# Altium PCB Dashboard.PcbDoc
Units mm, origin at the board's own origin, x right, y up, seen from the top; angles counter-clockwise.
Board outline 70.4 x 85 mm, 2 copper layers (Top Layer, Bottom Layer); 26 components, 60 nets, 195 pads, 3 vias.
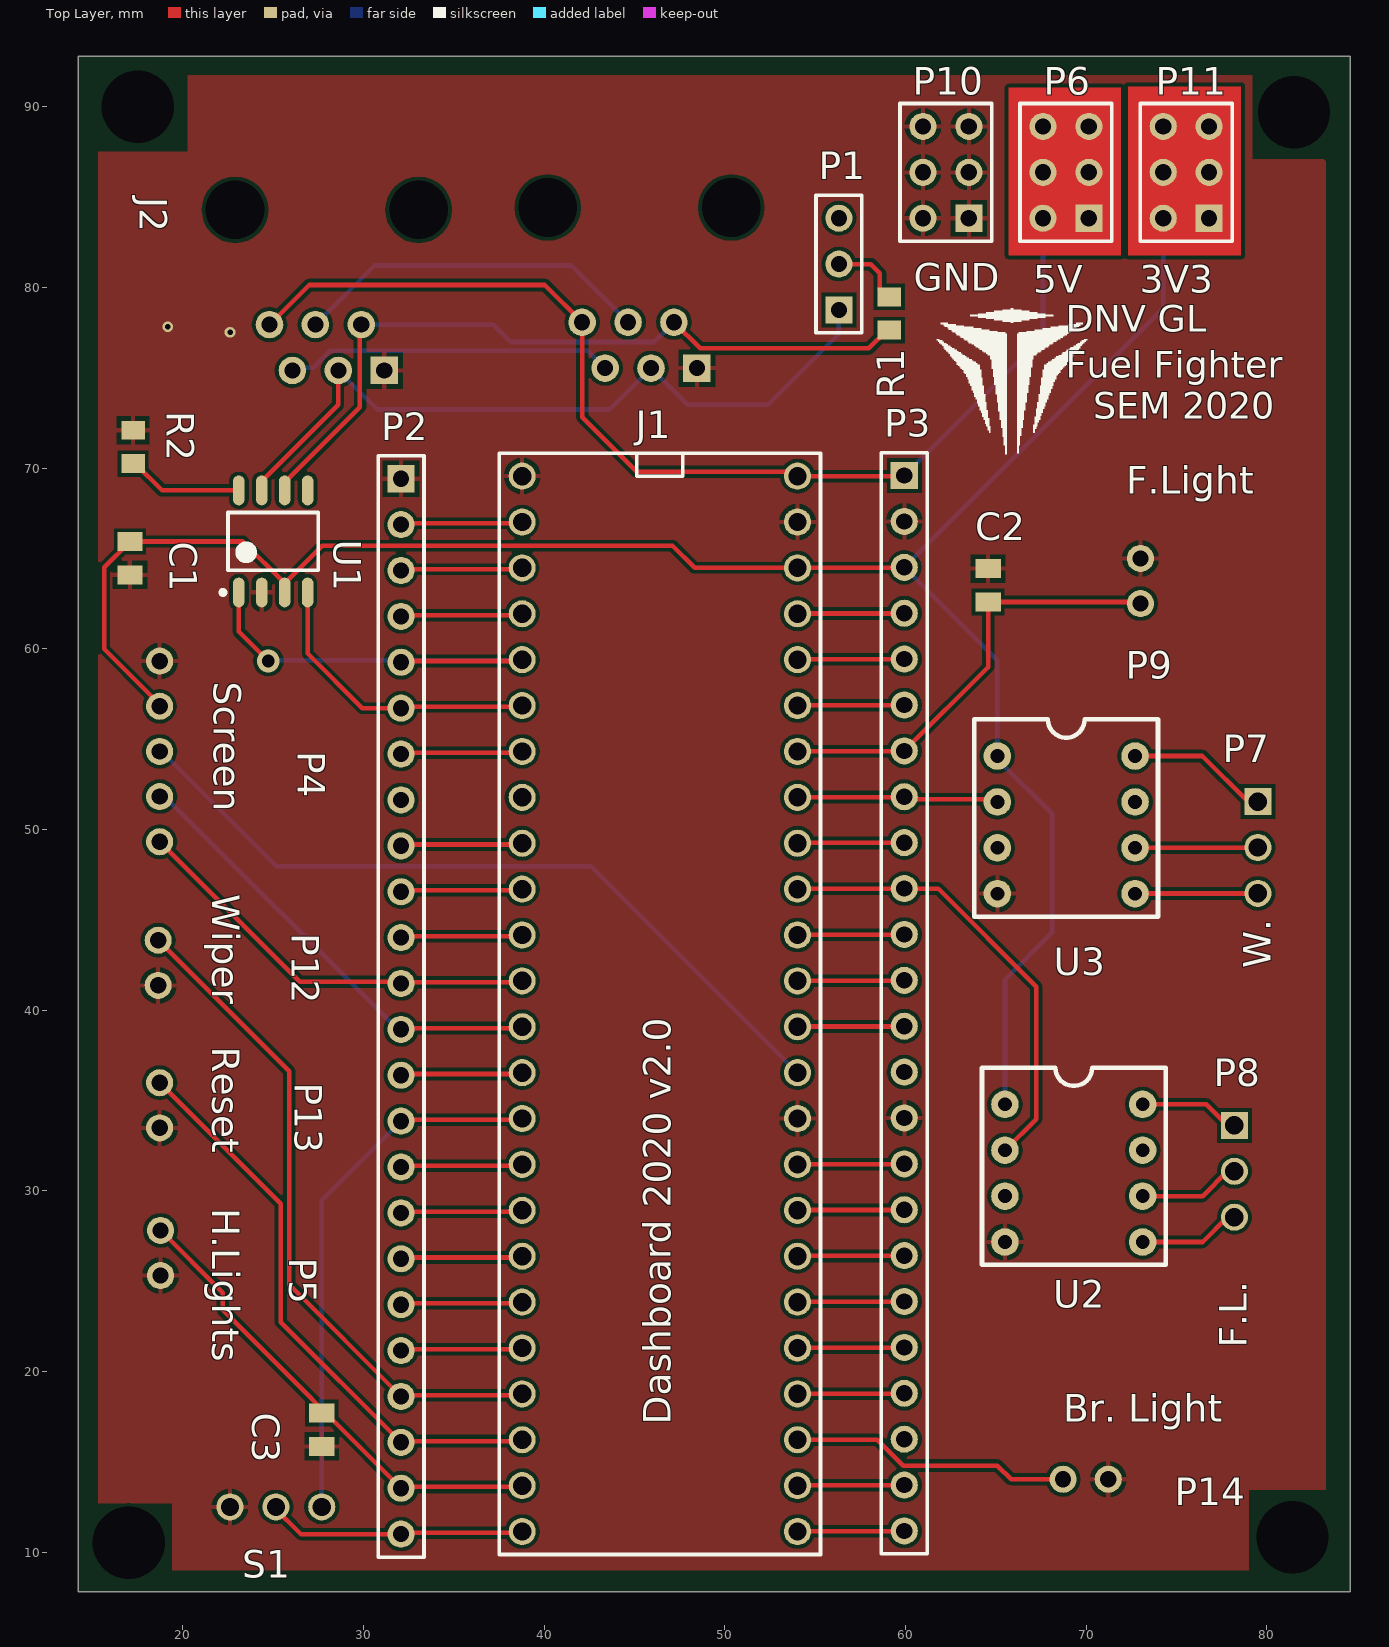
[diagram p0: Top Layer view]
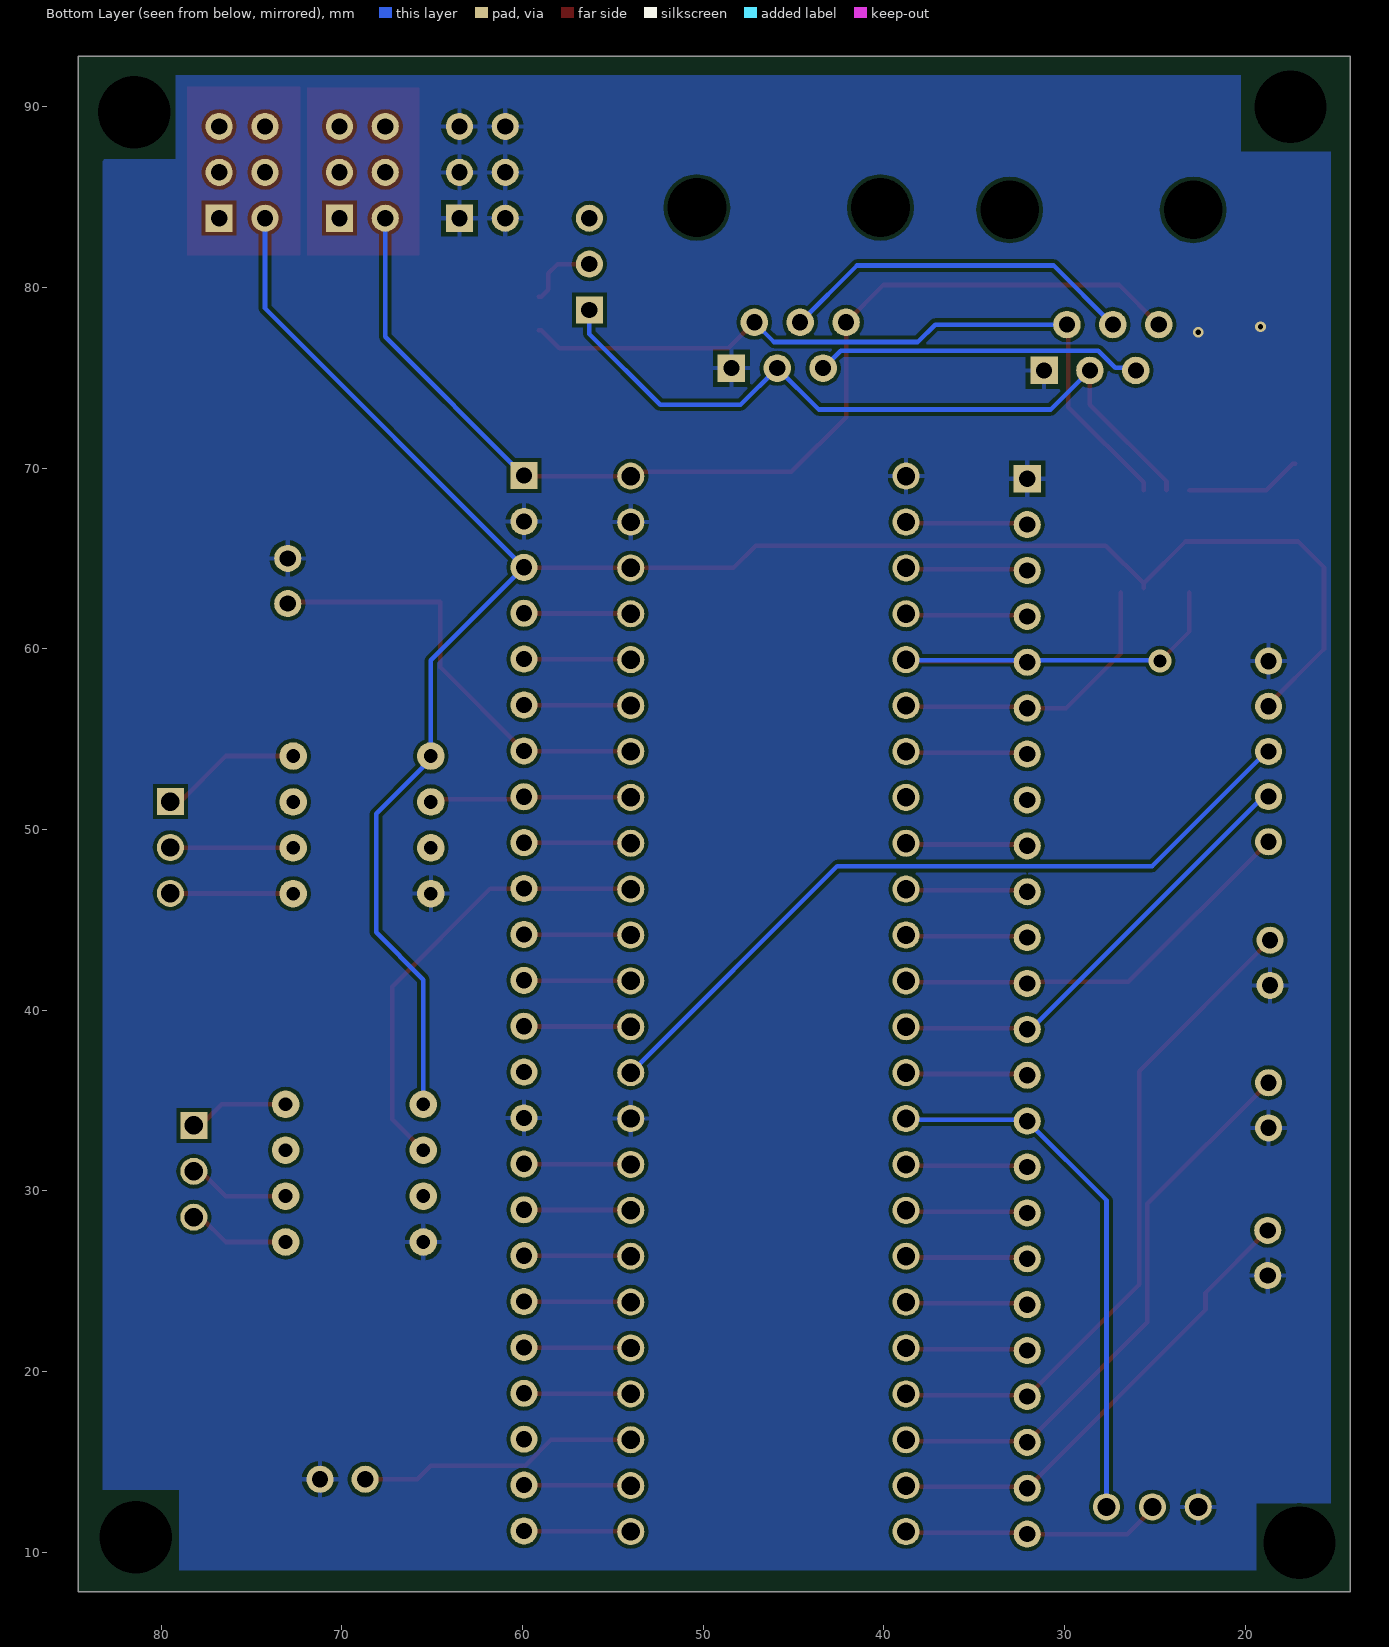
[diagram p1: Bottom Layer view, seen from below]
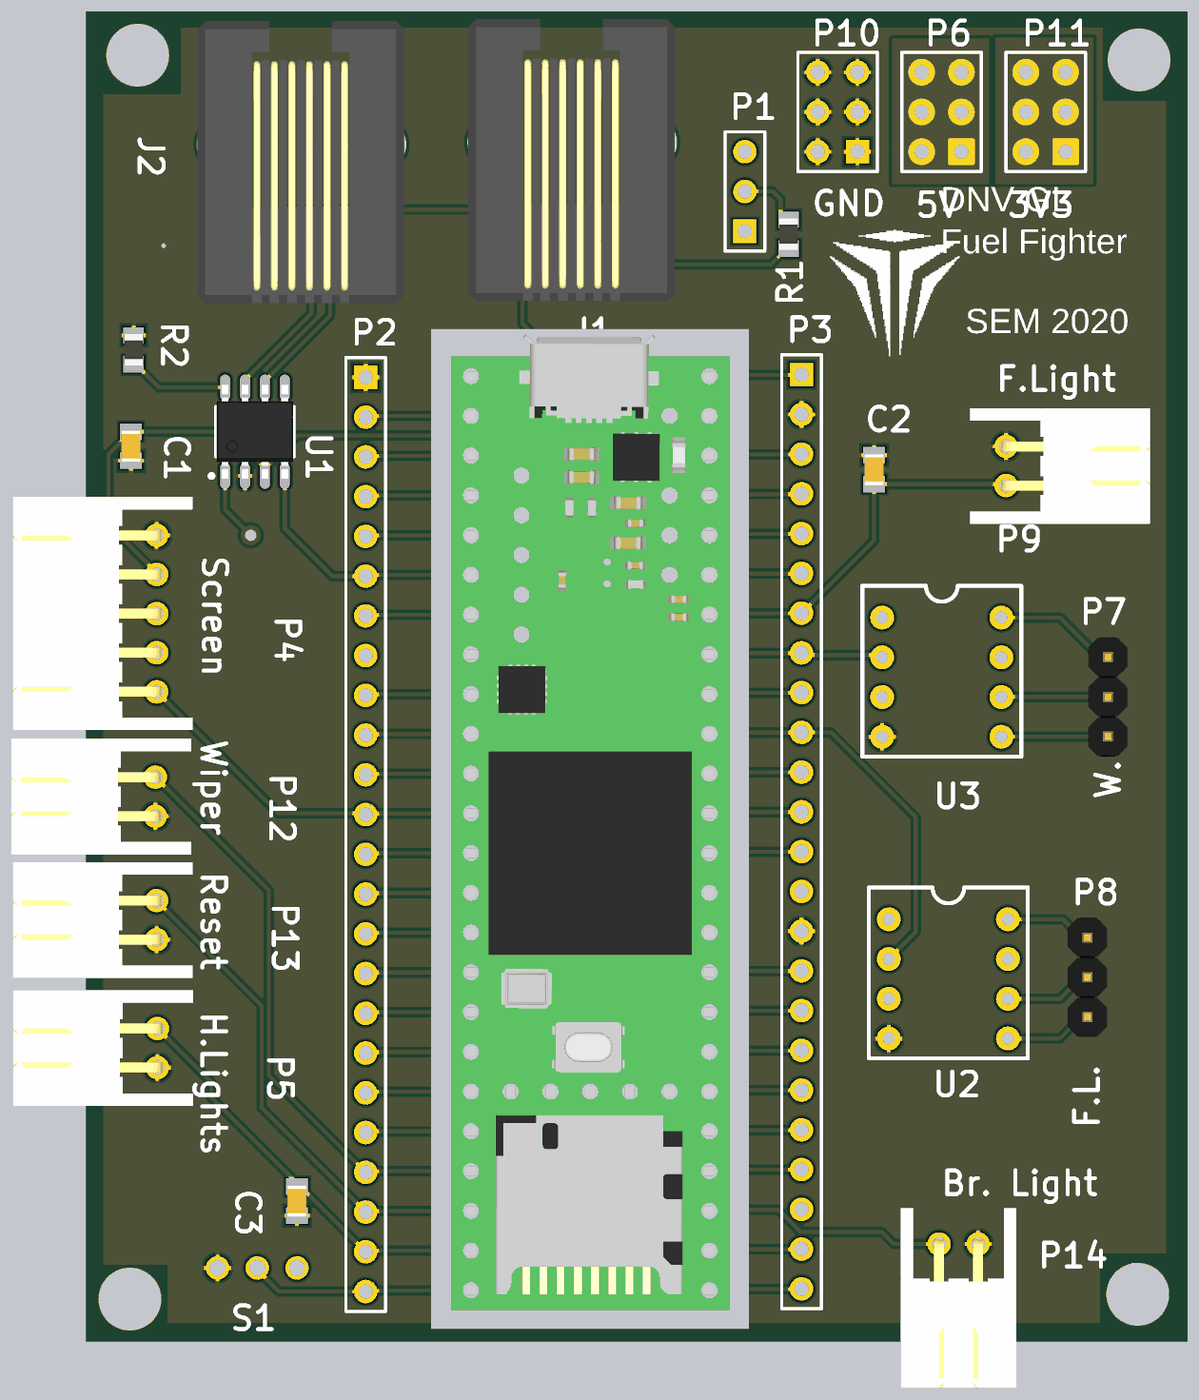
[diagram p2: 3D render of the assembled board from above, using the file's embedded part models]

## Layer stack, top to bottom
Top Solder: solder mask 0.0102, Solder Resist, Dk 3.5
Top Layer: signal copper 0.0356
Dielectric 1: dielectric 0.32, FR-4, Dk 4.8
Bottom Layer: signal copper 0.0356
Bottom Solder: solder mask 0.0102, Solder Resist, Dk 3.5

## Board outline
14.2,92.8 14.2,7.8 84.6,7.8 84.6,92.8

## Design rules (kind name [scope] priority, off if disabled: settings)
Clearance [All] p1: gap=0.203 ignorepadtopadclearanceinfootprint=FALSE
HoleSize [All] p1: absolutevalues=TRUE maxlimit=5 minlimit=0.025 maxpercent=80.000 minpercent=20.000
PolygonConnect [All] p1: thpad.connectstyle=Relief thpad.reliefconductorwidth=0.254 thpad.reliefentries=4 thpad.polygonreliefangle="90 Angle" thpad.airgapwidth=0.254 smdpad.connectstyle=Relief smdpad.reliefconductorwidth=0.254 smdpad.reliefentries=4 smdpad.polygonreliefangle="90 Angle" smdpad.airgapwidth=0.254 via.connectstyle=Direct via.reliefconductorwidth=0.254 via.reliefentries=4 via.polygonreliefangle="90 Angle" via.airgapwidth=0.254
RoomDefinition Dashboard [InComponentClass('Dashboard')] p1: confinementstyle=ConfineIn formatcopy=TRUE lockcomponents=FALSE outline 3.3,0 93.3,0 93.3,95.2 3.3,95.2
RoutingVias [All] p1: holewidth=0.711 width=1.27 viastyle="Through Hole" minholewidth=0.711 minwidth=1.27 maxholewidth=0.711 maxwidth=1.27
SolderMaskExpansion [All] p1: expansion=0.102 istentingtop=FALSE
Width [All] p1: maxlimit=2 minlimit=0.254 preferedwidth=0.254
29 further rules are at their usual default settings.

## Classes and differential pairs
component class Dashboard: C1 C2 C3 J1 J2 P1 P3 P4 P5 P6 P7 P8 P9 P10 P11 P12 P13 P14 R1 R2 S1 U1 U2 U3

## Components (designator, comment, footprint, x,y, rotation, side; value= is the part's Value field where it differs from the comment)
3 "teensy_3.6" teensy_3.6 38.141,71.461 r0 top
C1 "SMD" C_SMD_0805_pcb 17.07,65.012 r270 top value=100n
C2 "SMD" C_SMD_0805_pcb 64.568,63.512 r270 top
C3 "SMD" C_SMD_0805_pcb 27.68,16.772 r90 top
J1 "RJ11" RJ11_Connector 50.351,84.422 r180 top
J2 "RJ11" RJ11_Connector 33.043,84.295 r180 top
P1 "Header 3" HDR1X3 56.307,78.753 r90 top
P2 "Header 24" HDR1X24 32.07,69.412 r270 top
P3 "Header 24" HDR1X24 59.927,69.587 r270 top
P4 "JST_SE_5PIN" JST_SE_5PIN 18.709,49.316 r270 top
P5 "H.Lights" JST_SE_2PIN 18.757,27.804 r270 top
P6 "5V" HDR2X3 70.143,83.833 r90 top
P7 "1x3_M" PIN_HEADER_M_1x3 79.5,46.46 r90 top
P8 "1x3_M" PIN_HEADER_M_1x3 78.2,28.535 r90 top
P9 "F.Light" JST_SE_2PIN 73,62.5 r90 top
P10 "GND" HDR2X3 63.5,83.833 r90 top
P11 "3V3" HDR2X3 76.8,83.833 r90 top
P12 "Wiper" JST_SE_2PIN 18.627,43.868 r270 top
P13 "Reset" JST_SE_2PIN 18.709,35.979 r270 top
P14 "Br. Light" JST_SE_2PIN 68.715,14.028 r0 top
R1 "SMD" R_SMD_0805_pcb 59.102,78.559 r90 top value=120
R2 "SMD" R_SMD_0805_pcb 17.236,71.171 r270 top value=22k
S1 "SWITCH_3WAY_TOGGLE" SWITCH_ATE 27.68,12.5 r180 top
U1 "SN65GVD231d" SN65HVD231D_SMD 24.994,65.941 r90 top
U2 "IL_710-2E_DIGITAL_ISOLATOR" IL_710-2E_DIP8 65.5,34.782 r0 top
U3 "IL_710-2E_DIGITAL_ISOLATOR" IL_710-2E_DIP8 65.08,54.062 r0 top

## Footprints (in the part's own frame and the unit in brackets; to place one, negate y for a bottom-side part, rotate by r counter-clockwise, add the part's x,y. Pads: shape width x height; smd on the part's side, far side on the other; paste and mask are expansions set on the pad)
C_SMD_0805_pcb [mm] "Chip Capacitor, 2-Leads, Body 2,00x1,25mm, IPC Medium Density"
  rect 1.05x1.4 smd: 1(-0.925,0) 2(0.925,0)
  body extent -1,-0.63 1,0.62, height 1.35
HDR1X3 [mm] "Connector; Header; 3 Position"
  rect 1.5x1.5 hole 0.9: 1(0,0)
  round 1.5 hole 0.9: 2(2.54,0) 3(5.08,0)
  silkscreen extent -1.27,-1.27 6.35,1.27
HDR1X24 [mm] "Connector; Header; 24 Position"
  rect 1.5x1.5 hole 0.9: 1(0,0)
  round 1.5 hole 0.9: 2(2.54,0) 3(5.08,0) 4(7.62,0) 5(10.16,0) 6(12.7,0) 7(15.24,0) 8(17.78,0) 9(20.32,0) 10(22.86,0) 11(25.4,0) 12(27.94,0) 13(30.48,0) 14(33.02,0) 15(35.56,0) 16(38.1,0) 17(40.64,0) 18(43.18,0) 19(45.72,0) 20(48.26,0) 21(50.8,0) 22(53.34,0) 23(55.88,0) 24(58.42,0)
  silkscreen extent -1.27,-1.27 59.69,1.27
HDR2X3 [mm] "Connector; Header; 3x2 Position"
  rect 1.5x1.5 hole 0.9: 1(0,0)
  round 1.5 hole 0.9: 2(0,2.54) 3(2.54,0) 4(2.54,2.54) 5(5.08,0) 6(5.08,2.54)
  silkscreen extent -1.27,-1.27 6.35,3.81
IL_710-2E_DIP8 [mil]
  round 60 hole 30: 1(0,0) 2(0,-100) 3(0,-200) 4(0,-300) 5(300,-300) 6(300,-200) 7(300,-100) 8(300,0)
  silkscreen extent -50,-350 350,80
JST_SE_2PIN [mm]
  round 1.5 hole 0.9: 1(0,0) 2(2.5,0)
  body extent -2.45,-9.2 4.95,2.3, height 6.1
JST_SE_5PIN [mm] "for side PCB"
  round 1.5 hole 0.9: 1(0,0) 2(-2.5,0) 3(-5,0) 4(-7.5,0) 5(-10,0)
  body extent -12.45,-9.2 2.45,2.3, height 6.1
PIN_HEADER_M_1x3 [mm]
  rect 1.5x1.5 hole 1.02: 1(5.08,0)
  round 1.5 hole 1.02: 2(2.54,0) 3(0,0)
  body extent -1.27,-1.27 6.35,1.27, height 8.34
R_SMD_0805_pcb [mm]
  rect 1.05x1.3 smd: 1(-0.925,0) 2(0.925,0)
  body extent -1,-0.6 1,0.6, height 0.65
RJ11_Connector [mil]
  rect 60x60 hole 35.04: 1(75,350)
  round 60 hole 35.04: 2(125,250) 3(175,350) 4(225,250) 5(275,350) 6(325,250)
  round 60 hole 127.95 unplated: ""(0,0) ""(400,0)
  body extent -58,-310 462,399, height 461
SN65HVD231D_SMD [mm]
  oval 1.65x0.65 smd: 1(-2.825,1.905) 2(-2.825,0.635) 3(-2.825,-0.635) 4(-2.825,-1.905) 5(2.825,-1.905) 6(2.825,-0.635) 7(2.825,0.635) 8(2.825,1.905)
  silkscreen extent -2.95,-2.5 1.6,2.9, body extent -3,-2.45 3,2.45, height 1.91
SWITCH_ATE [mm] "ATE1D-2M3-10-Z"
  round 1.5 hole 1: 1(0,0) 2(2.54,0) 3(5.08,0)
  body extent -1.78,-2.29 6.86,2.29, height 8.34
teensy_3.6 [mm]
  round 1.5 hole 1.016: 0(0.635,-4.445) 1(0.635,-6.985) 2(0.635,-9.525) 3(0.635,-12.065) 4(0.635,-14.605) 5(0.635,-17.145) 6(0.635,-19.685) 7(0.635,-22.225) 8(0.635,-24.765) 9(0.635,-27.305) 10(0.635,-29.845) 11(0.635,-32.385) 12(0.635,-34.925) 13(15.875,-34.925) 14(15.875,-32.385) 15(15.875,-29.845) 16(15.875,-27.305) 17(15.875,-24.765) 18(15.875,-22.225) 19(15.875,-19.685) 20(15.875,-17.145) 21(15.875,-14.605) 22(15.875,-12.065) 23(15.875,-9.525) 24(0.635,-40.005) 25(0.635,-42.545) 26(0.635,-45.085) 27(0.635,-47.625) 28(0.635,-50.165) 29(0.635,-52.705) 30(0.635,-55.245) 31(0.635,-57.785) 32(0.635,-60.325) 33(15.875,-60.325) 34(15.875,-57.785) 35(15.875,-55.245) 36(15.875,-52.705) 37(15.875,-50.165) 38(15.875,-47.625) 39(15.875,-45.085) +3V3(0.635,-37.465) +3V3(15.875,-6.985) A21(15.875,-42.545) A22(15.875,-40.005) AGND(15.875,-4.445) GND(0.635,-1.905) GND(15.875,-37.465) VIN(15.875,-1.905)
  silkscreen extent -0.64,-61.59 17.14,-0.64, body extent -0.62,-61.66 17.16,0.7, height 7.49

## Part data
C1 C2 C3: library part C_SMD_0805
  C2: C2=100n
  C3: C3=100n
J1 J2: library part RJ11_Connector
P1: "Header, 3-Pin", LatestRevisionDate=17-Jul-2002, LatestRevisionNote="Re-released for DXP Platform.", Publisher="Altium Limited"
P2 P3: "Header, 24-Pin", LatestRevisionDate=17-Jul-2002, LatestRevisionNote="Re-released for DXP Platform.", Publisher="Altium Limited"
P5 P9 P12 P13 P14: library part JST_SE_2PIN
P6 P10 P11: library part "Header 3X2", "Header, 3-Pin, Dual row", LatestRevisionDate=17-Jul-2002, LatestRevisionNote="Re-released for DXP Platform.", Publisher="Altium Limited"
P7 P8: library part PIN_HEADER_M_1x3
R1 R2: library part R_SMD_0805
U1: library part SN65HVD231D_SMD
U2 U3: "Digital Isolator 3-5V input/output."

## Free pads (board coordinates)
  round 1.524 hole 4: 4(17.5,90) 5(17,10.512) 6(81.417,10.815) 7(81.5,89.7)

## Via types
v1: diameter 0.6, hole 0.3, Top Layer to Bottom Layer, tented both sides, 2 vias
v2: diameter 1.27, hole 0.711, Top Layer to Bottom Layer, tented both sides, 1 vias

## Nets (pads, with @x,y where several pads share a name; then routed paths per layer and width w, separated by ;. In a path a pad name is that pad's centre, name@x,y a point inside that pad or via, vN(x,y) a via of type N, cw(c..) or ccw(c..) an arc to the next point about the centre after c; other vN are vias at no path point)
3V3: 3.+3V3 C1.1 P2.15 P3.3 P4.4 P11.1 P11.2 P11.3 P11.4 P11.5 P11.6 S1.1 U1.3 U2.1 U3.1 | length 152.6
  Top Layer w0.254: P4.4@18.809,56.816 15.639,59.985 15.639,64.506 C1.1 23.307,65.937 U1.3@25.629,63.616 ; U1.3@25.629,63.366 U1.3@25.629,63.616 ; P2.15 32.141,33.924 38.704,33.924 3.+3V3@38.776,33.996 ; P3.3 59.911,64.491 54.032,64.491 54.016,64.476 48.324,64.476 47.094,65.706 27.719,65.706 U1.3@25.629,63.616
  Bottom Layer w0.254: S1.1@27.68,12.519 27.68,29.463 P2.15 32.141,33.924 38.704,33.924 3.+3V3@38.776,33.996 ; U2.1 65.5,41.688 68.112,44.3 68.112,50.862 65.08,53.894 U3.1 65.08,59.354 P3.3 74.26,78.84 P11.2
+5: 3.VIN J1.6 J2.6 P3.1 P6.1 P6.2 P6.3 P6.4 P6.5 P6.6 | length 63.5
  Top Layer w0.254: J2.6 26.98,80.137 40.031,80.137 J1.6 42.096,72.824 45.126,69.794 53.778,69.794 3.VIN 59.896,69.556 P3.1
  Top Layer w0.508: P6.4 P6.6
  Bottom Layer w0.254: P3.1 67.603,77.263 P6.2
GND: 3.AGND 3.GND C1.2 C2.1 C3.1 J1.1 J2.1 P2.1 P3.2 P3.15 P4.5 P5.2 P9.2 P10.1 P10.2 P10.3 P10.4 P10.5 P10.6 P12.2 P13.2 P14.2 R2.1 S1.3 U1.2 U2.4 U3.4
  other v1: 22.606,77.52 19.154,77.824
Net3_0: 3.0 P2.2 | length 6.8
  Top Layer w0.254: P2.2 32.141,66.944 38.704,66.944 3.0
Net3_1: 3.1 P2.3 | length 6.8
  Top Layer w0.254: P2.3 32.141,64.404 38.704,64.404 3.1
Net3_2: 3.2 P2.4 | length 6.8
  Top Layer w0.254: P2.4 32.141,61.864 38.704,61.864 3.2
Net3_3: 3.3 P2.5 U1.1 | length 25.3
  Top Layer w0.254: U1.1 23.089,60.956 v2(24.72,59.324) ; P2.5 32.141,59.324 38.704,59.324 3.3
  Bottom Layer w0.254: v2(24.72,59.324) 24.756,59.36 38.74,59.36 3.3
Net3_4: 3.4 P2.6 U1.4 | length 16.6
  Top Layer w0.254: U1.4 26.899,59.736 29.923,56.712 P2.6 32.141,56.784 38.704,56.784 3.4
Net3_5: 3.5 P2.7 | length 6.8
  Top Layer w0.254: P2.7 32.141,54.244 38.704,54.244 3.5
Net3_6: 3.6
Net3_7: 3.7 P2.9 | length 6.8
  Top Layer w0.254: P2.9 32.141,49.164 38.704,49.164 3.7
Net3_8: 3.8 P2.10 | length 6.8
  Top Layer w0.254: P2.10 32.141,46.624 38.704,46.624 3.8
Net3_9: 3.9 P2.11 | length 6.8
  Top Layer w0.254: P2.11 32.141,44.084 38.704,44.084 3.9
Net3_10: 3.10 P2.12 P4.1 | length 23.4
  Top Layer w0.254: P4.1 26.466,41.559 31.983,41.559 P2.12 32.141,41.544 38.704,41.544 3.10
Net3_11: 3.11 P2.13 P4.2 | length 25.4
  Top Layer w0.254: P2.13 32.141,39.004 38.704,39.004 3.11
  Bottom Layer w0.254: P4.2@18.809,51.816 18.998,51.816 31.881,38.932 P2.13
Net3_12: 3.12 P2.14 | length 6.8
  Top Layer w0.254: P2.14 32.141,36.464 38.704,36.464 3.12
Net3_13: 3.13 P4.3 | length 42.6
  Bottom Layer w0.254: P4.3@18.809,54.316 25.152,47.972 42.579,47.972 3.13
Net3_14: 3.14 P3.13 | length 5.9
  Top Layer w0.254: 3.14 54.032,39.091 59.911,39.091 P3.13
Net3_15: 3.15 P3.12 | length 5.9
  Top Layer w0.254: 3.15 54.032,41.631 59.911,41.631 P3.12
Net3_16: 3.16 P3.11 | length 5.9
  Top Layer w0.254: 3.16 54.032,44.171 59.911,44.171 P3.11
Net3_17: 3.17 P3.10 U2.2 | length 25.2
  Top Layer w0.254: 3.17 54.032,46.711 59.911,46.711 P3.10 61.799,46.727 67.225,41.301 67.225,33.967 U2.2
Net3_18: 3.18 P3.9 | length 5.9
  Top Layer w0.254: 3.18 54.032,49.251 59.911,49.251 P3.9
Net3_19: 3.19 P3.8 U3.2 | length 11.2
  Top Layer w0.254: 3.19 54.032,51.791 59.911,51.791 60.038,51.665 64.937,51.665 U3.2
Net3_20: 3.20 C2.2 P3.7 P9.1 | length 24.6
  Top Layer w0.254: 3.20 54.032,54.331 59.911,54.331 P3.7 64.568,58.988 C2.2 72.773,62.587 P9.1@73,62.361
Net3_21: 3.21 P3.6 | length 5.9
  Top Layer w0.254: 3.21 54.032,56.871 59.911,56.871 P3.6
Net3_22: 3.22 P3.5 | length 5.9
  Top Layer w0.254: 3.22 54.032,59.411 59.911,59.411 P3.5
Net3_23: 3.23 P3.4 | length 5.9
  Top Layer w0.254: 3.23 54.032,61.951 59.911,61.951 P3.4
Net3_24: 3.24 P2.16 | length 6.8
  Top Layer w0.254: P2.16 32.141,31.384 38.704,31.384 3.24
Net3_25: 3.25 P2.17 | length 6.8
  Top Layer w0.254: P2.17 32.141,28.844 38.704,28.844 3.25
Net3_26: 3.26 P2.18 | length 6.8
  Top Layer w0.254: P2.18 32.141,26.304 38.704,26.304 3.26
Net3_27: 3.27 P2.19 | length 6.8
  Top Layer w0.254: P2.19 32.141,23.764 38.704,23.764 3.27
Net3_28: 3.28 P2.20 | length 6.8
  Top Layer w0.254: P2.20 32.141,21.224 38.704,21.224 3.28
Net3_29: 3.29 P2.21 P12.1 | length 37.6
  Top Layer w0.254: P12.1 25.875,36.619 25.875,24.807 P2.21 32.141,18.684 38.704,18.684 3.29
Net3_30: 3.30 P2.22 P13.1 | length 32.2
  Top Layer w0.254: P13.1 25.418,29.27 25.418,22.724 P2.22 32.141,16.144 38.704,16.144 3.30
Net3_31: 3.31 C3.2 P2.23 P5.1 | length 26.8
  Top Layer w0.254: P5.1 22.2,24.361 22.2,23.402 P2.23 32.141,13.604 38.704,13.604 3.31
  Bottom Layer w0.254: P2.23@31.851,13.532 P2.23
Net3_32: 3.32 P2.24 S1.2 | length 14.4
  Top Layer w0.254: S1.2@25.034,12.489 26.531,10.992 P2.24 32.141,11.064 38.704,11.064 3.32
Net3_33: 3.33 P3.24 | length 5.9
  Top Layer w0.254: 3.33 54.032,11.151 59.911,11.151 P3.24
Net3_34: 3.34 P3.23 | length 5.9
  Top Layer w0.254: 3.34 54.032,13.691 59.911,13.691 P3.23
Net3_35: 3.35 P14.1 | length 15.6
  Top Layer w0.254: 3.35 58.431,16.216 59.859,14.787 65.079,14.787 65.838,14.028 P14.1
Net3_36: 3.36 P3.21 | length 5.9
  Top Layer w0.254: 3.36 54.032,18.771 59.911,18.771 P3.21
Net3_37: 3.37 P3.20 | length 5.9
  Top Layer w0.254: 3.37 54.032,21.311 59.911,21.311 P3.20
Net3_38: 3.38 P3.19 | length 5.9
  Top Layer w0.254: 3.38 54.032,23.851 59.911,23.851 P3.19
Net3_39: 3.39 P3.18 | length 5.9
  Top Layer w0.254: 3.39 54.032,26.391 59.911,26.391 P3.18
Net3_A21: 3.A21 P3.17 | length 5.9
  Top Layer w0.254: 3.A21 54.032,28.931 59.911,28.931 P3.17
Net3_A22: 3.A22 P3.16 | length 5.9
  Top Layer w0.254: 3.A22 54.032,31.471 59.911,31.471 P3.16
NetJ1_2: J1.2 J2.2 R1.1 U1.6 | length 42
  Top Layer w0.254: U1.6 25.629,69.208 29.794,73.373 29.794,77.871 J2.2 ; J1.2 48.624,76.624 57.967,76.624 58.977,77.634 R1.1
  Bottom Layer w0.254: J2.2 37.168,77.945 38.133,76.98 46.084,76.98 J1.2
NetJ1_3: J1.3 J2.3 P1.1 U1.7 | length 41.7
  Top Layer w0.254: U1.7 24.359,69.266 28.598,73.505 J2.3
  Bottom Layer w0.254: J2.3 30.759,73.244 43.618,73.244 J1.3 47.938,73.5 52.383,73.5 56.307,77.424 P1.1
NetJ1_4: J1.4 J2.4 | length 20
  Bottom Layer w0.254: J2.4 30.6,81.217 41.491,81.217 J1.4
NetJ1_5: J1.5 J2.5 | length 18.2
  Bottom Layer w0.254: J2.5 26.206,75.553 27.201,75.553 28.146,76.497 42.401,76.497 J1.5
NetP1_2: P1.2 R1.2 | length 4.1
  Top Layer w0.254: P1.2 58.068,81.293 58.579,80.782 58.579,79.882 58.977,79.484 R1.2
NetP2_8: P2.8
NetP3_14: P3.14
NetP3_22: P3.22
NetP7_1: P7.1 U3.8 | length 7.3
  Top Layer w0.254: U3.8 76.427,54.062 P7.1@78.931,51.558
NetP7_2: P7.2 U3.6 | length 6.8
  Top Layer w0.254: U3.6 72.709,48.991 79.491,48.991 P7.2
NetP7_3: P7.3 U3.5 | length 6.8
  Top Layer w0.254: U3.5 72.709,46.451 79.491,46.451 P7.3
NetP8_1: P8.1 U2.8 | length 5.6
  Top Layer w0.254: U2.8 76.649,34.782 77.813,33.619 P8.1@78.2,33.619
NetP8_2: P8.2 U2.6 | length 5.7
  Top Layer w0.254: U2.6 76.437,29.702 77.813,31.079 P8.2@78.2,31.079
NetP8_3: P8.3 U2.5 | length 5.6
  Top Layer w0.254: U2.5 76.437,27.162 77.813,28.539 P8.3@78.2,28.539
NetR2_2: R2.2 U1.8 | length 6.5
  Top Layer w0.254: R2.2 17.361,70.246 18.841,68.766 U1.8
pads on no net: J1. J2. P1.3 U1.5 U2.3 U2.7 U3.3 U3.7

## Polygon pours and split planes (outlines as drawn)
GND on Bottom Layer "Bottom Layer-GND" (solid, pour order 4): 15.259,12.712 19.4,12.712 19.4,9 79,9 79,13.437 83.243,13.437 83.243,87.089 79.2,87.089 79.2,91.75 20.25,91.75 20.25,87.5 15.259,87.5
GND on Top Layer "Top Layer-GND" (solid, pour order 0): 19.4,9 19.4,12.712 15.307,12.712 15.307,87.5 20.25,87.5 20.25,91.75 79.2,91.75 79.2,87.089 83.243,87.089 83.243,13.437 79,13.437 79,9

## Other copper
Top Layer:
  rectangle net 3V3: 72.304,81.774 78.57,91.137
  rectangle net +5: 65.7,81.774 71.925,91.058

## Silkscreen, mask and mechanical layers (free items; w line width, h text height)
Top Overlay:
  drawing of 5 lines, arcs and shapes, not listed
  text "GND" at 60.454,79.812 h1.52
  text "5V" at 67.071,79.706 h1.52
  text "DNV GL / Fuel Fighter" at 68.853,74.516 h2.54
  text "SEM 2020" at 70.392,72.244 h2.54
  text "F.Light" at 72.225,68.594 h1.52
  text "Screen" at 21.7,58.168 h1.52 r270
  text "W." at 80.225,42.325 h1.52 r90
  text "F.L." at 78.88,21.311 h1.52 r90
  text "Dashboard 2020 v2.0" at 47,17.034 h1.52 r90
Mechanical 1:
  lines w0.254: 14.375,7.95 14.375,92.65 84.45,92.65 84.45,7.95 14.375,7.95